# EAGLE board PCB_2D (EAGLE 9.7.0)
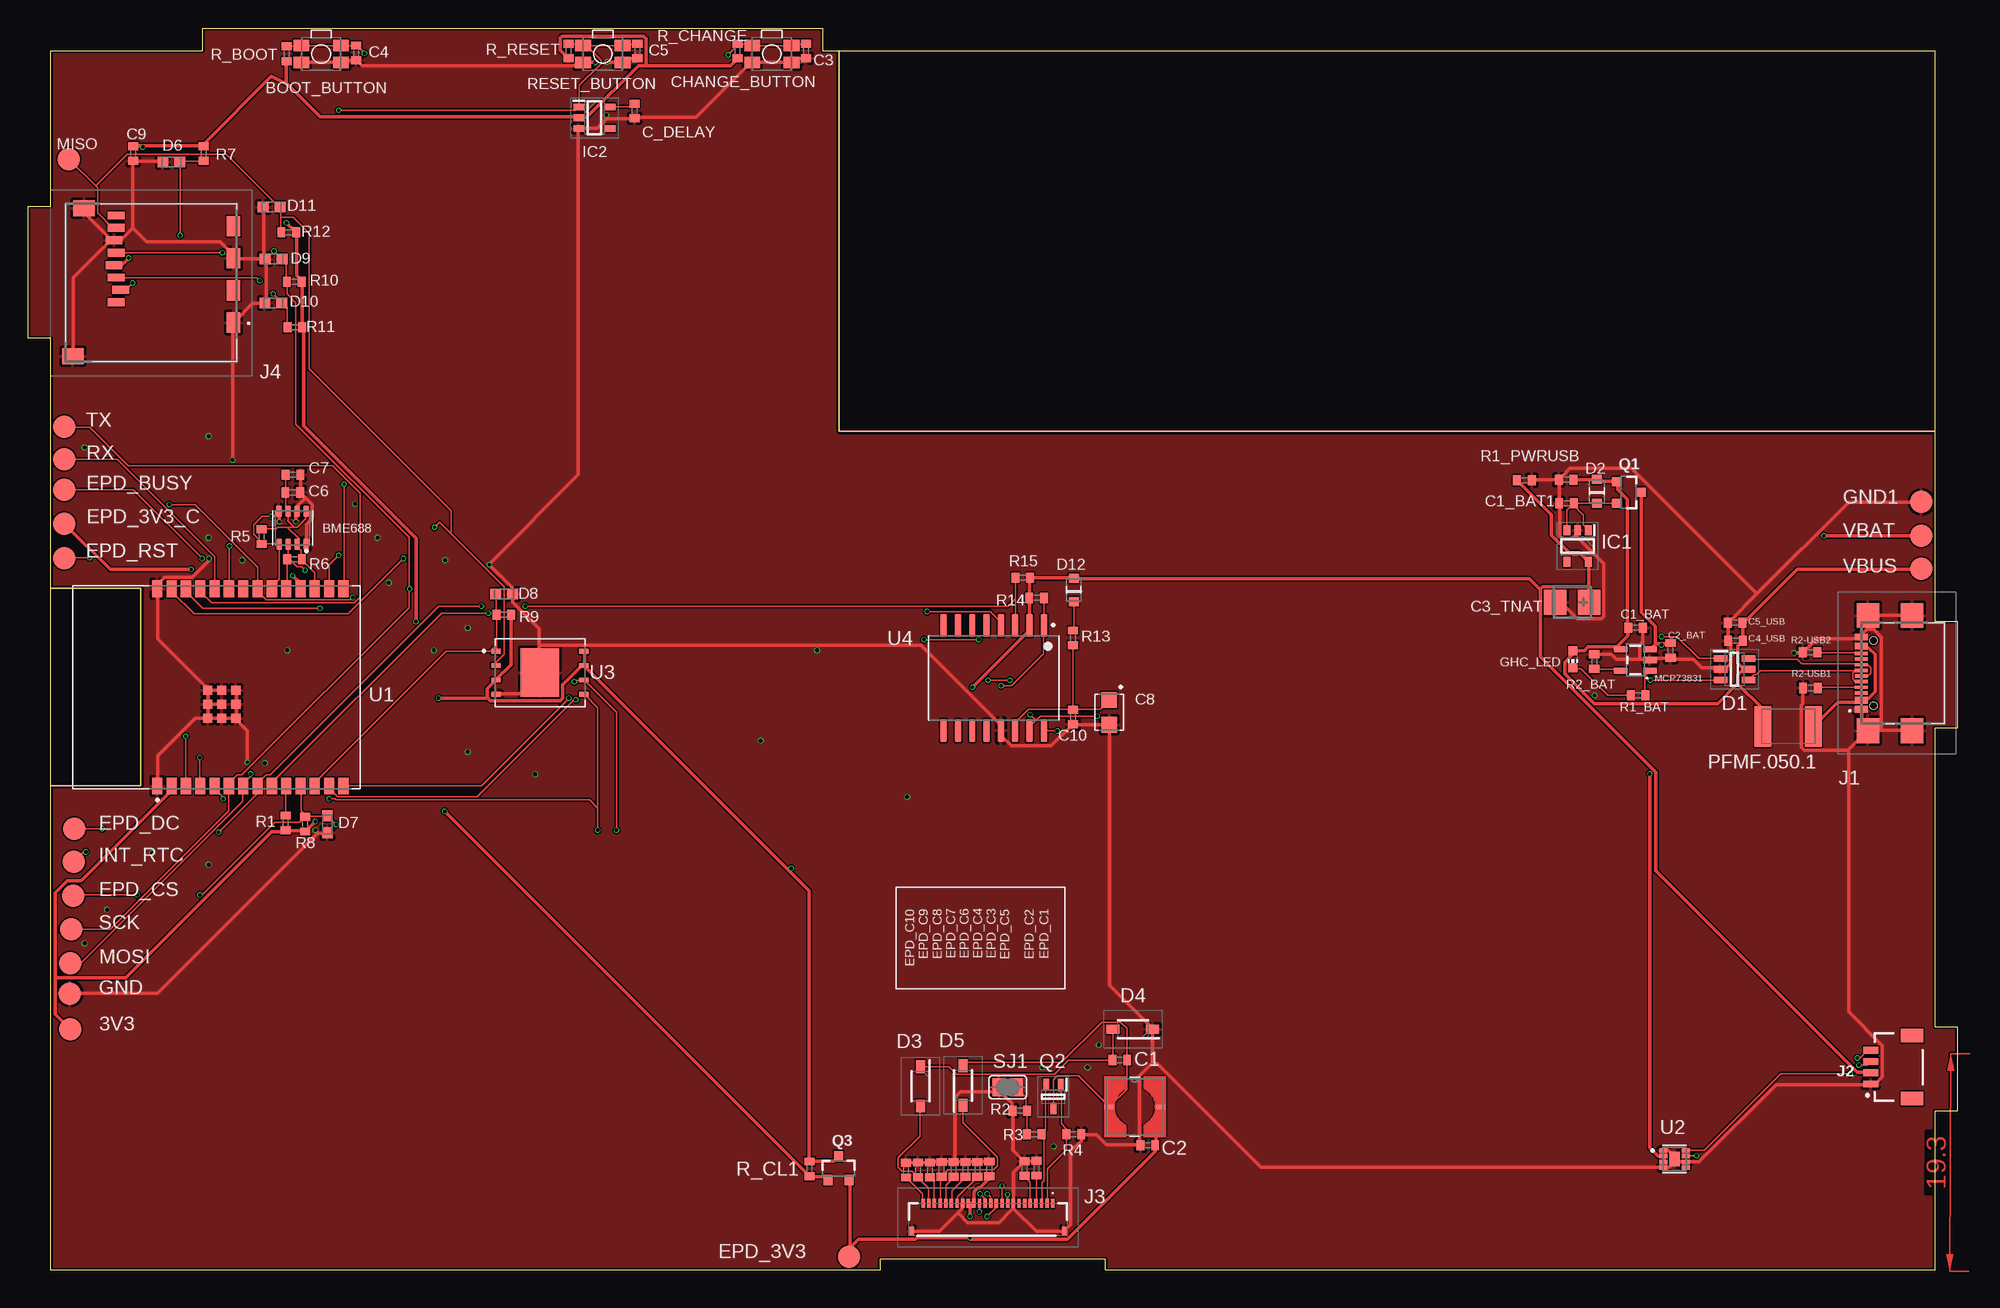
[diagram p0: board, top side]
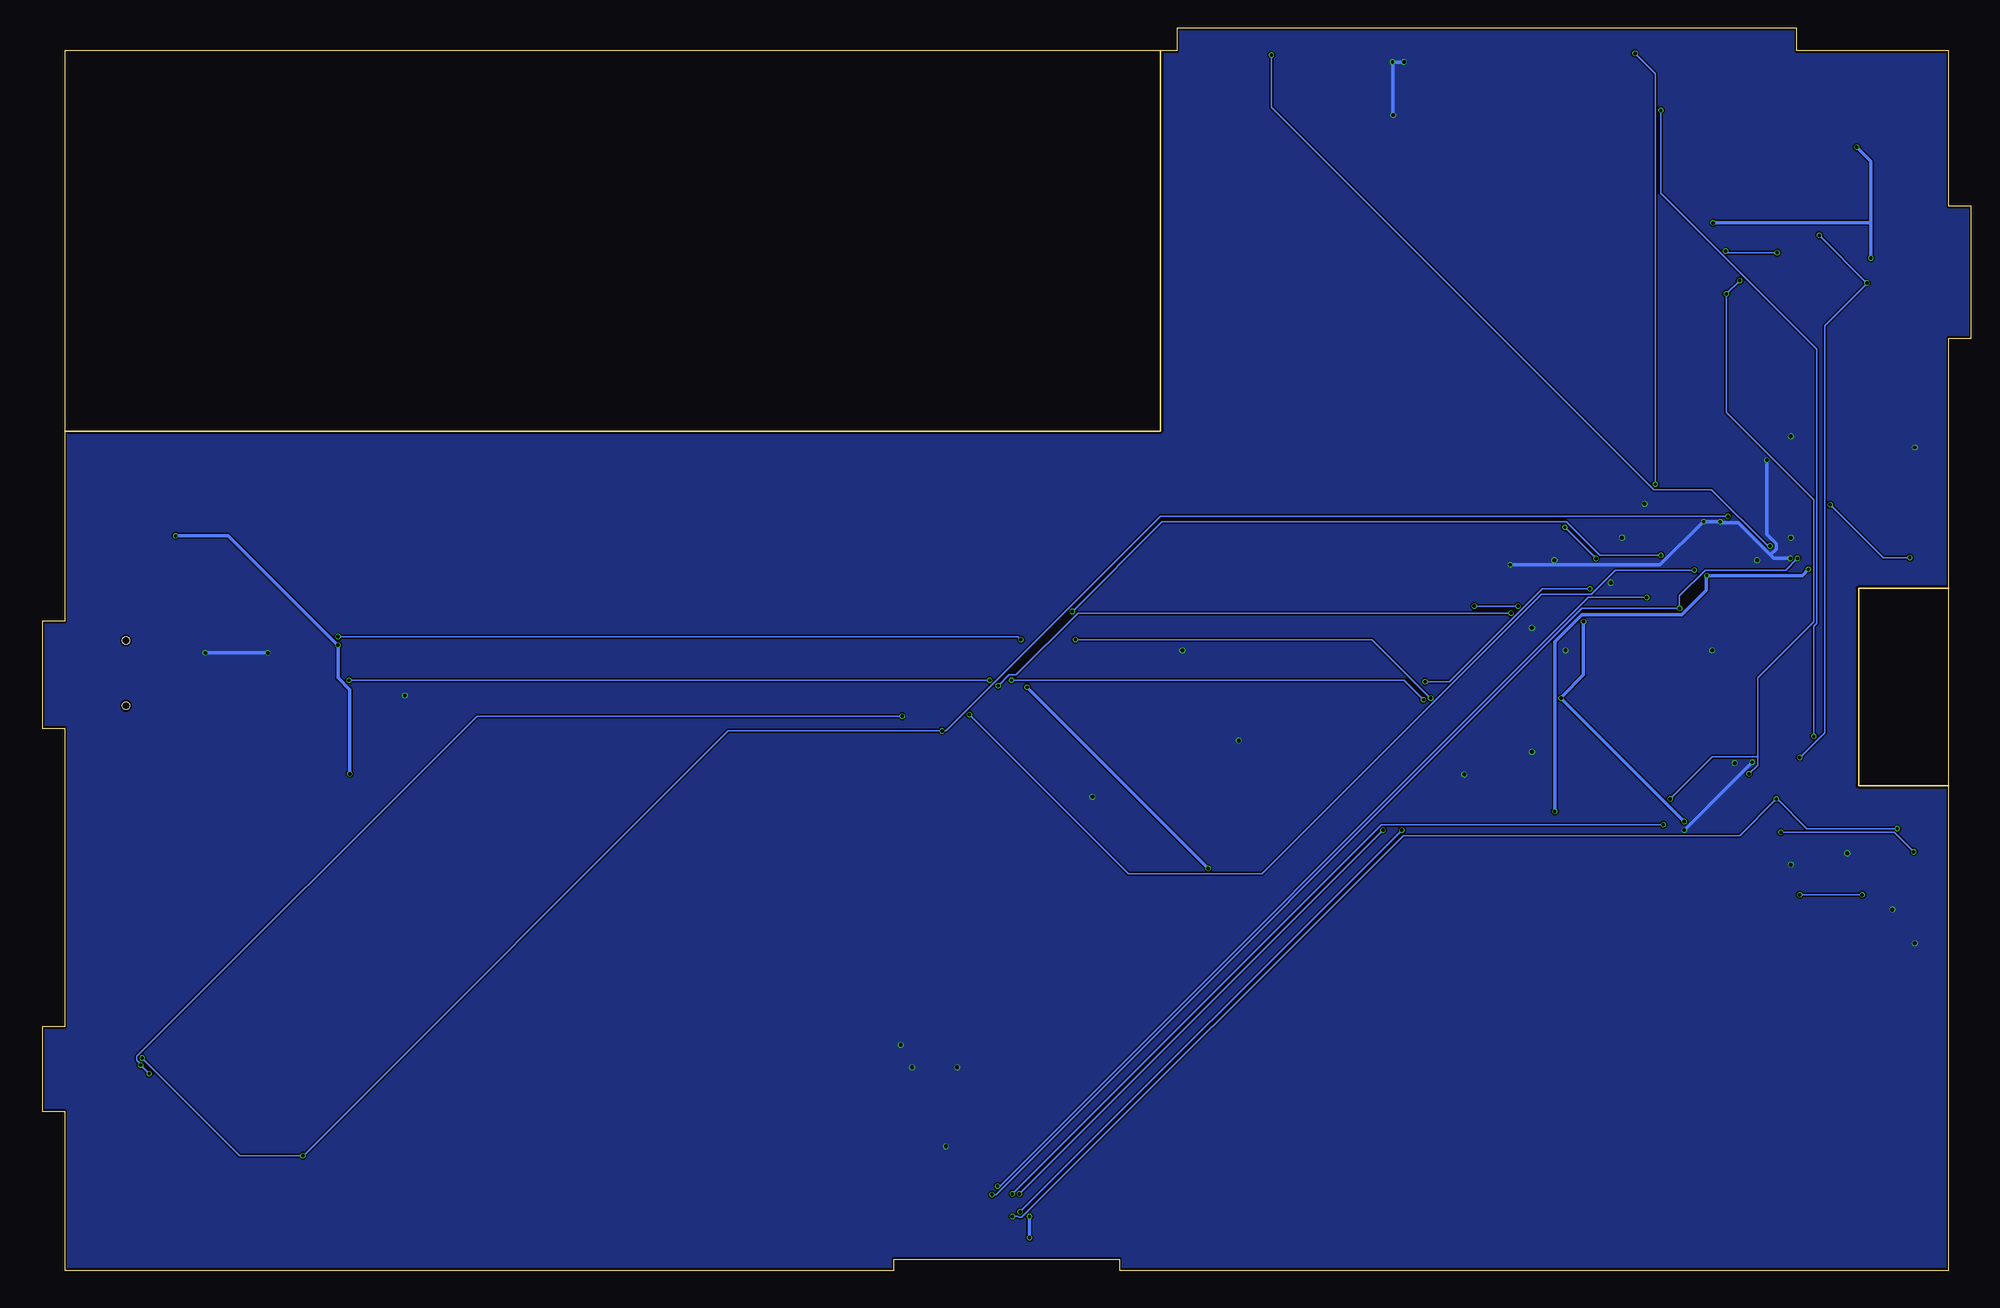
[diagram p1: board, bottom side, seen from below]

Size 171.2 x 110.2 mm. Coordinates in mm from the lower left corner, seen from the top.
Outline: 169.2,74.45 169.2,108.2 71.97,108.2
Outline: 169.2,74.45 169.2,57.6 171.2,57.6 171.2,48.1 169.2,48.1 169.2,21.63 171.2,21.63 171.2,14.1 169.2,14.1 169.2,0 95.6,0 95.6,1 75.6,1 75.6,0 2,0 2,43
Outline: 71.97,108.2 70.5,108.2 70.5,110.2 15.5,110.2 15.5,108.2 2,108.2 2,94.4 0,94.4 0,82.7 2,82.7 2,60.51
Outline: 2,43 2,60.51
Outline: 2,60.51 10,60.51 10,43 2,43
Outline: 71.97,108.2 71.97,74.45 169.2,74.45
Copper layers (1*16): Top 0.035mm / dielectric 1.6mm / Bottom 0.035mm
Design rules "jlcpcb-2layers.dru *": minimum track width 0.15mm, minimum drill 0.3mm, track to track 5mil, track to pad 5mil, pad to pad 5mil, via to via 5mil, smd to smd 5mil, copper to edge 0.2mm, drill to drill 6mil, minimum pad ring 10mil, minimum via ring 3mil, stop-mask expansion 4mil, vias tented up to drill 0mil, thermal gap 10mil
Net classes: 1 Power class: width 0.3 mm

## Footprints (pad centres in the part's own frame; a part is rotated, then mirrored left to right if it is on the bottom)
TP20R = smd 2 x 2: TP 0,0
ESP32_WROVER_BME680_PSON80P300X300X100-8N = smd 1.016 x 0.5: 1 1.458,1.2; 2 1.458,0.4; 3 1.458,-0.4; 4 1.458,-1.2; 5 -1.458,-1.22; 6 -1.458,-0.4; 7 -1.458,0.4; 8 -1.458,1.2
MYBUTTON = smd 1.4 x 1.05: 1 1.75,0.75; 2 -1.75,0.75; 3 -1.75,-0.75; 4 1.75,-0.75
EAGLE-LTSPICE_C0402 = smd 0.7 x 0.9: 1 -0.65,0; 2 0.65,0
RCL_CT3528 = smd 2 x 2.2: + -1.5,0; - 1.5,0
CAPCP3225X100N = smd 1.4 x 1.4: 1 -1.1,0; 2 1.1,0
SOT95P280X145-6N = smd 1.2 x 0.6: 1 -1.25,0.95; 2 -1.25,0; 3 -1.25,-0.95; 4 1.25,-0.95; 5 1.25,0; 6 1.25,0.95
ESP32_WROVER_AVX---SD0805S020S1R0_AVX_SD0805S020S1R0_0 = smd 0.8 x 0.9: 1 -1.05,0; 2 1.05,0
SOD3716X135N = smd 1.15 x 0.8: 1 -1.75,0; 2 1.75,0
DIOC1608X36N = smd 0.97 x 0.94: 1 -0.75,0; 2 0.75,0
ADAFRUIT_CHIP-LED0603 = smd 0.8 x 0.8: A 0,-0.75; C 0,0.75
SOT95P280X120-5N = smd 0.9 x 0.6: 1 -1.4,0.95; 2 -1.4,0; 3 -1.4,-0.95; 4 1.4,-0.95; 5 1.4,0.95
SOT95P280X125-5N = smd 0.9 x 0.6: 1 -1.4,0.95; 2 -1.4,0; 3 -1.4,-0.95; 4 1.4,-0.95; 5 1.4,0.95
SAMACSYS_PARTS_USB4110GFA = smd 0.3 x 1.15: A1 -3.35,3.678; A4 -2.55,3.678; A5 -1.25,3.678; A6 -0.25,3.678; A7 0.25,3.678; A8 1.25,3.678; A9 2.55,3.678; A12 3.35,3.678; B1 3.05,3.678; B4 2.25,3.678; B5 1.75,3.678; B6 0.75,3.678; B7 -0.75,3.678; B8 -1.75,3.678; B9 -2.25,3.678; B12 -3.05,3.678 | smd 2.18 x 2: MP1 -5.11,-0.827; MP2 5.11,-0.827; MP3 -5.11,3.103; MP4 5.11,3.103 | hole 0.65: -2.89,2.603; 2.89,2.603
JST04_1MM_RA = smd 0.6 x 1.35: 1 -1.5,0; 2 -0.5,0; 3 0.5,0; 4 1.5,0 | smd 1.2 x 2: NC1 2.8,-3.675; NC2 -2.8,-3.675
FH34SRJ24S05SH99 = smd 0.3 x 0.8: 1 5.75,1.45; 2 5.25,1.45; 3 4.75,1.45; 4 4.25,1.45; 5 3.75,1.45; 6 3.25,1.45; 7 2.75,1.45; 8 2.25,1.45; 9 1.75,1.45; 10 1.25,1.45; 11 0.75,1.45; 12 0.25,1.45; 13 -0.25,1.45; 14 -0.75,1.45; 15 -1.25,1.45; 16 -1.75,1.45; 17 -2.25,1.45; 18 -2.75,1.45; 19 -3.25,1.45; 20 -3.75,1.45; 21 -4.25,1.45; 22 -4.75,1.45; 23 -5.25,1.45; 24 -5.75,1.45 | smd 0.4 x 0.8: MP1 6.75,-1.05; MP2 -6.75,-1.05
112ATAARR03ATTEND = smd 1.8 x 1.2: G1 10.6,10.4; G2 4.9,10.4; S1 7.75,10.4; S2 2.05,10.4 | smd 1.4 x 1.9: G3 13.6,-3.85; G4 0.45,-2.85 | smd 0.7 x 1.5: P1 8.8,0; P2 7.7,0.4; P3 6.6,0; P4 5.5,-0.2; P5 4.4,0; P6 3.3,-0.2; P7 2.2,0; P8 1.1,0
IND_4828-WE-TPC_WRE = smd 0.813 x 0.406: 1 -2.286,0; 2 2.286,0
ESP32_WROVER_SPARKFUN-IC-POWER_SOT23-5 = smd 0.55 x 1.2: 1 -0.95,-1.3; 2 0,-1.3; 3 0.95,-1.3; 4 0.95,1.3; 5 -0.95,1.3
ESP32C6_VARISTOR_CT/CN1812 = smd 1.5 x 3.6: 1 -2.25,0; 2 2.25,0
ESP32_WROVER_SPARKFUN-DISCRETESEMI_SOT23-3 = smd 0.8 x 0.9: 1 -0.95,-1; 2 0.95,-1; 3 0,1.1
SOT65P210X110-3N = smd 1.05 x 0.5: 1 -1.05,0.65; 2 -1.05,-0.65; 3 1.05,0
ESP32_WROVER_EAGLE-LTSPICE_R0402 = smd 0.7 x 0.9: 1 -0.65,0; 2 0.65,0
SJ = smd 1.168 x 1.6: 1 -0.762,0; 2 0.762,0
XCVR_ESP32-C6-WROOM-1-N8 = smd 1.5 x 0.9: 1 -8.75,5.26; 2 -8.75,3.99; 3 -8.75,2.72; 4 -8.75,1.45; 5 -8.75,0.18; 6 -8.75,-1.09; 7 -8.75,-2.36; 8 -8.75,-3.63; 9 -8.75,-4.9; 10 -8.75,-6.17; 11 -8.75,-7.44; 12 -8.75,-8.71; 13 -8.75,-9.98; 14 -8.75,-11.25; 15 8.75,-11.25; 16 8.75,-9.98; 17 8.75,-8.71; 18 8.75,-7.44; 19 8.75,-6.17; 20 8.75,-4.9; 21 8.75,-3.63; 22 8.75,-2.36; 23 8.75,-1.09; 24 8.75,0.18; 25 8.75,1.45; 26 8.75,2.72; 27 8.75,3.99; 28 8.75,5.26 | smd 0.8 x 0.8: 29_1 -2.755,0.79; 29_2 -1.505,0.79; 29_3 -0.255,0.79; 29_4 -2.755,-0.46; 29_5 -1.505,-0.46; 29_6 -0.255,-0.46; 29_7 -2.755,-1.71; 29_8 -1.505,-1.71; 29_9 -0.255,-1.71
SON50P200X200X80-9N = smd 0.813 x 0.406: 1 -0.985,0.75; 2 -0.985,0.25; 3 -0.985,-0.25; 4 -0.985,-0.75; 5 0.985,-0.75; 6 0.985,-0.25; 7 0.985,0.25; 8 0.985,0.75 | smd 0.9 x 1.3: 9 0,0
SON127P600X800X80-9N = smd 0.94 x 0.44: 1 -3.895,1.905; 2 -3.895,0.635; 3 -3.895,-0.635; 4 -3.895,-1.905; 5 3.895,-1.905; 6 3.895,-0.635; 7 3.895,0.635; 8 3.895,1.905 | smd 3.4 x 4.3: 9 0,0
SOIC127P1032X265-16N = smd 2.05 x 0.59: 1 -4.655,4.445; 2 -4.655,3.175; 3 -4.655,1.905; 4 -4.655,0.635; 5 -4.655,-0.635; 6 -4.655,-1.905; 7 -4.655,-3.175; 8 -4.655,-4.445; 9 4.655,-4.445; 10 4.655,-3.175; 11 4.655,-1.905; 12 4.655,-0.635; 13 4.655,0.635; 14 4.655,1.905; 15 4.655,3.175; 16 4.655,4.445

## Placement (x,y rotation side)
3V3  TPTP20R  [TP20R]  3.74,21.38 0 top
BME688  ESP32_WROVER_BME680_BME680  [ESP32_WROVER_BME680_PSON80P300X300X100-8N]  23.47,65.88 270 top
BOOT_BUTTON  BUTTON_CUSYOMV1  [MYBUTTON]  26,107.91 180 top
C1  4.7uF/25V  [EAGLE-LTSPICE_C0402]  96.87,18.66 0 top
C1_BAT  4.7uF  [EAGLE-LTSPICE_C0402]  142.63,57.01 0 top
C1_BAT1  4.7uF  [EAGLE-LTSPICE_C0402]  136.5,68.06 180 top
C1_BAT2  4.7uF  [EAGLE-LTSPICE_C0402]  132.77,70.08 0 top
C2  10uF  [EAGLE-LTSPICE_C0402]  99.36,11.09 180 top
C2_BAT  4.7uF  [EAGLE-LTSPICE_C0402]  145.74,55.01 270 top
C3  100nF  [EAGLE-LTSPICE_C0402]  69.03,108.18 270 top
C3_TNAT  100uF  [RCL_CT3528]  137.01,59.26 180 top
C4  100nF  [EAGLE-LTSPICE_C0402]  29.1,108.01 270 top
C4_USB  100nF  [EAGLE-LTSPICE_C0402]  151.49,55.86 180 top
C5  1uF  [EAGLE-LTSPICE_C0402]  54.06,108.17 270 top
C5_USB  4.7uF  [EAGLE-LTSPICE_C0402]  151.47,57.46 180 top
C6  100nF  [EAGLE-LTSPICE_C0402]  23.48,69.01 0 top
C7  100nF  [EAGLE-LTSPICE_C0402]  23.51,70.57 0 top
C8  CPH3225A  [CAPCP3225X100N]  95.93,49.5 270 top
C9  100nF  [EAGLE-LTSPICE_C0402]  9.33,99.09 270 top
C10  100nF  [EAGLE-LTSPICE_C0402]  92.71,49.09 270 top
C_DELAY  100nF  [EAGLE-LTSPICE_C0402]  53.82,102.85 270 top
CHANGE_BUTTON  BUTTON_CUSYOMV1  [MYBUTTON]  66,107.91 180 top
D1  USBLC6-2SC6Y  [SOT95P280X145-6N]  151.41,53.33 0 top
D2  ESP32_WROVER_AVX---SD0805S020S1R0_AVX_SD0805S020S1R0_0_0AVX_SD0805S020S1R0_0_0  [ESP32_WROVER_AVX---SD0805S020S1R0_AVX_SD0805S020S1R0_0]  139.2,69.12 90 top
D3  MBR0530""  [SOD3716X135N]  79.18,16.33 270 top
D4  MBR0530""  [SOD3716X135N]  98.03,21.4 180 top
D5  MBR0530""  [SOD3716X135N]  82.95,16.41 90 top
D6  PGB1010603MR""  [DIOC1608X36N]  12.71,98.33 0 top
D7  PGB1010603MR""  [DIOC1608X36N]  26.54,39.58 90 top
D8  PGB1010603MR""  [DIOC1608X36N]  42.24,60.02 180 top
D9  PGB1010603MR""  [DIOC1608X36N]  21.79,89.71 0 top
D10  PGB1010603MR""  [DIOC1608X36N]  21.76,85.83 0 top
D11  PGB1010603MR""  [DIOC1608X36N]  21.61,94.33 0 top
D12  ESP32_WROVER_AVX---SD0805S020S1R0_AVX_SD0805S020S1R0_0_0AVX_SD0805S020S1R0_0_0  [ESP32_WROVER_AVX---SD0805S020S1R0_AVX_SD0805S020S1R0_0]  92.79,60.37 90 top
EPD_3V3  TPTP20R  [TP20R]  72.86,1.2 0 top
EPD_3V3_C  TPTP20R  [TP20R]  3.22,66.25 0 top
EPD_BUSY  TPTP20R  [TP20R]  3.2,69.25 0 top
EPD_C1  1uF/50V  [EAGLE-LTSPICE_C0402]  89.47,9.06 270 top
EPD_C2  1uF/50V  [EAGLE-LTSPICE_C0402]  88.42,9.03 270 top
EPD_C3  1uF/50V  [EAGLE-LTSPICE_C0402]  84.22,8.97 270 top
EPD_C4  1uF/50V  [EAGLE-LTSPICE_C0402]  83.17,8.96 270 top
EPD_C5  0.1uF/50V  [EAGLE-LTSPICE_C0402]  85.28,9.01 270 top
EPD_C6  1uF/50V  [EAGLE-LTSPICE_C0402]  82.12,8.96 270 top
EPD_C7  1uF/50V  [EAGLE-LTSPICE_C0402]  81.07,8.96 270 top
EPD_C8  1uF/50V  [EAGLE-LTSPICE_C0402]  80.01,8.92 270 top
EPD_C9  1uF/50V  [EAGLE-LTSPICE_C0402]  78.96,8.92 270 top
EPD_C10  1uF/50V  [EAGLE-LTSPICE_C0402]  77.91,8.88 270 top
EPD_CS  TPTP20R  [TP20R]  3.98,33.25 0 top
EPD_DC  TPTP20R  [TP20R]  4.1,39.17 0 top
EPD_RST  TPTP20R  [TP20R]  3.2,63.17 0 top
GHC_LED  [ADAFRUIT_CHIP-LED0603]  137.07,54.21 180 top
GND  TPTP20R  [TP20R]  3.71,24.55 0 top
GND1  TPTP20R  [TP20R]  168,68.17 0 top
IC1  XC6220A331MR-G  [SOT95P280X120-5N]  137.5,64.25 270 top
IC2  BD5229G-TR  [SOT95P280X125-5N]  50.26,102.25 0 top
INT_RTC  TPTP20R  [TP20R]  4.06,36.25 0 top
J1  SAMACSYS_PARTS_USB4110-GF-A  [SAMACSYS_PARTS_USB4110GFA]  166.36,52.98 90 top
J2  QWIIC_RIGHT_ANGLE  [JST04_1MM_RA]  163.51,18.03 90 top
J3  FH34SRJ-24S-0.5SH_99_  [FH34SRJ24S05SH99]  85.17,4.5 0 top
J4  112A-TAAR-R03_ATTENDPACHET  [112ATAARR03ATTEND]  7.82,94.68 270 top
L1  68uH  [IND_4828-WE-TPC_WRE]  98.2,14.51 0 top
MCP73831  ESP32_WROVER_SPARKFUN-IC-POWER_MCP73831  [ESP32_WROVER_SPARKFUN-IC-POWER_SOT23-5]  142.61,54.15 90 top
MISO  TPTP20R  [TP20R]  3.61,98.56 0 top
MOSI  TPTP20R  [TP20R]  3.74,27.25 0 top
PFMF.050.1  ESP32C6_VARISTORCN1812  [ESP32C6_VARISTOR_CT/CN1812]  156.17,48.26 180 top
Q1  20V/4.2A/52mΩ/1.4W  [ESP32_WROVER_SPARKFUN-DISCRETESEMI_SOT23-3]  141.99,69.02 270 top
Q2  SI1308EDL-T1-GE3  [SOT65P210X110-3N]  90.98,15.41 270 top
Q3  20V/4.2A/52mΩ/1.4W  [ESP32_WROVER_SPARKFUN-DISCRETESEMI_SOT23-3]  71.91,9.02 0 top
R1  10K  [ESP32_WROVER_EAGLE-LTSPICE_R0402]  22.87,39.7 270 top
R1_BAT  200  [ESP32_WROVER_EAGLE-LTSPICE_R0402]  142.85,51.01 0 top
R1_PWRUSB  100K  [ESP32_WROVER_EAGLE-LTSPICE_R0402]  136.47,70.13 0 top
R2  2.2  [ESP32_WROVER_EAGLE-LTSPICE_R0402]  87.98,14.17 0 top
R2-USB1  5K1  [ESP32_WROVER_EAGLE-LTSPICE_R0402]  158.15,51.67 0 top
R2-USB2  5K1  [ESP32_WROVER_EAGLE-LTSPICE_R0402]  158.12,54.84 180 top
R2_BAT  2K  [ESP32_WROVER_EAGLE-LTSPICE_R0402]  138.96,54.01 270 top
R3  0.47  [ESP32_WROVER_EAGLE-LTSPICE_R0402]  89.28,12.09 0 top
R4  10K  [ESP32_WROVER_EAGLE-LTSPICE_R0402]  92.8,12.09 180 top
R5  10K  [ESP32_WROVER_EAGLE-LTSPICE_R0402]  20.72,65.09 90 top
R6  10K  [ESP32_WROVER_EAGLE-LTSPICE_R0402]  23.64,63.09 0 top
R7  10K  [ESP32_WROVER_EAGLE-LTSPICE_R0402]  15.56,99.09 90 top
R8  10K  [ESP32_WROVER_EAGLE-LTSPICE_R0402]  24.59,39.59 270 top
R9  10K  [ESP32_WROVER_EAGLE-LTSPICE_R0402]  42.22,58.17 0 top
R10  10K  [ESP32_WROVER_EAGLE-LTSPICE_R0402]  23.61,87.72 0 top
R11  10K  [ESP32_WROVER_EAGLE-LTSPICE_R0402]  23.67,83.67 0 top
R12  10K  [ESP32_WROVER_EAGLE-LTSPICE_R0402]  23.12,92.09 0 top
R13  15  [ESP32_WROVER_EAGLE-LTSPICE_R0402]  92.72,56.11 270 top
R14  10K  [ESP32_WROVER_EAGLE-LTSPICE_R0402]  89.48,59.65 180 top
R15  10K  [ESP32_WROVER_EAGLE-LTSPICE_R0402]  88.26,61.43 0 top
R_BOOT  10K  [ESP32_WROVER_EAGLE-LTSPICE_R0402]  22.95,107.93 270 top
R_CHANGE  10K  [ESP32_WROVER_EAGLE-LTSPICE_R0402]  62.95,108.18 270 top
R_CL1  10K  [ESP32_WROVER_EAGLE-LTSPICE_R0402]  69.34,9.01 90 top
R_RESET  10K  [ESP32_WROVER_EAGLE-LTSPICE_R0402]  47.95,108.18 270 top
RESET_BUTTON  BUTTON_CUSYOMV1  [MYBUTTON]  51,107.91 180 top
RX  TPTP20R  [TP20R]  3.2,71.97 0 top
SCK  TPTP20R  [TP20R]  3.82,30.25 0 top
SJ1  [SJ]  86.93,16.25 0 top
TX  TPTP20R  [TP20R]  3.2,74.85 0 top
U1  ESP32-C6-WROOM-1-N8  [XCVR_ESP32-C6-WROOM-1-N8]  16.73,51.72 90 top
U2  MAX17048G+T10  [SON50P200X200X80-9N]  146.1,9.88 0 top
U3  W25Q512JVEIQ  [SON127P600X800X80-9N]  45.42,53.02 0 top
U4  DS3231SN#  [SOIC127P1032X265-16N]  85.68,52.56 270 top
VBAT  TPTP20R  [TP20R]  168,65.17 0 top
VBUS  TPTP20R  [TP20R]  168,62.25 0 top

## Library data of the parts
3V3 BOOT_BUTTON CHANGE_BUTTON D3-D11 EPD_3V3 EPD_3V3_C EPD_BUSY EPD_CS EPD_DC EPD_RST GHC_LED GND GND1 INT_RTC J4 MISO MOSI PFMF.050.1 R1 R1_BAT R1_PWRUSB R2 R2-USB1 R2-USB2 R2_BAT R3-R15 R_BOOT R_CHANGE R_CL1 R_RESET RESET_BUTTON RX SCK SJ1 TX VBAT VBUS = DeskAssistant v19 v1
BME688 = DeskAssistant v19 v1; AVAILABILITY: Unavailable; DESCRIPTION: Integrated Environmental Unit; MF: Bosch Sensortec; MP: BME680; PACKAGE: LGA-8 Bosch Tools; PRICE: None
C1 C1_BAT C1_BAT1 C1_BAT2 C2 C2_BAT C3 C4 C4_USB C5 C5_USB C6 C7 C9 C10 C_DELAY EPD_C1-EPD_C10 = DeskAssistant v19 v1; SPICEMODEL: NONE; SPICEPREFIX: C
C3_TNAT = DeskAssistant v19 v1; SPICEPREFIX: C
C8 = DeskAssistant v19 v1; AVAILABILITY: Not in stock; CHECK_PRICES: https://www.snapeda.com/parts/CPH3225A/Seiko+Instruments/view-part/?ref=eda; DESCRIPTION: 11 mF (EDLC) Supercapacitor 3.3 V 1210 (3225 Metric) - -; MF: Seiko Instruments; MP: CPH3225A; PACKAGE: 1210 Seiko; PRICE: None; PURCHASE-URL: https://www.snapeda.com/api/url_track_click_mouser/?unipart_id=562593&manufacturer=Seiko Instruments&part_name=CPH3225A&search_term=None; SNAPEDA_LINK: https://www.snapeda.com/parts/CPH3225A/Seiko+Instruments/view-part/?ref=snap
D1 = DeskAssistant v19 v1; AVAILABILITY: In Stock; CHECK_PRICES: https://www.snapeda.com/parts/USBLC6-2SC6Y/STMicroelectronics/view-part/?ref=eda; DESCRIPTION: 17V Clamp 5A (8/20µs) Ipp Tvs Diode Surface Mount SOT-23-6; MF: STMicroelectronics; MP: USBLC6-2SC6Y; PACKAGE: SOT-23-6 STMicroelectronics; PRICE: None; SNAPEDA_LINK: https://www.snapeda.com/parts/USBLC6-2SC6Y/STMicroelectronics/view-part/?ref=snap
D2 D12 = DeskAssistant v19 v1; CENTROID_NOT_SPECIFIED: No; DATASHEET: http://datasheets.avx.com/schottky.pdf; DIGIKEY_DESCRIPTION: DIODE SCHOTTKY 20V 1A 0805; DIGIKEY_PART_NUMBER: 478-7800-1-ND; LEAD_FREE: yes; MF: AVX; MOUSER_PART_NUMBER: 581-SD0805S020S1R0; PACKAGE: 0805 (2012 metric); PREFIX: D; ROHS: yes; TEMPERATURE_RANGE_HIGH: +125°C; TEMPERATURE_RANGE_LOW: -55°C
IC1 = DeskAssistant v19 v1; DESCRIPTION: LDO Voltage Regulators; HEIGHT: 1.2mm; MANUFACTURER_NAME: Torex; MANUFACTURER_PART_NUMBER: XC6220A331MR-G; MOUSER_PART_NUMBER: 865-XC6220A331MR-G; MOUSER_PRICE-STOCK: https://www.mouser.co.uk/ProductDetail/Torex-Semiconductor/XC6220A331MR-G?qs=AsjdqWjXhJ8ZSWznL1J0gg%3D%3D
IC2 = DeskAssistant v19 v1; DESCRIPTION: Voltage Detector with Adjustable Delay Time: CMOS processes are utilized to develop high precision, low current consumption CMOS reset ICs that allow arbitrary setting of the delay time. The extensive lineup includes both Nch Open Drain and CMOS output types in a wide range of detection voltages (from 2.3V to 6.0V, in 0.1V steps), enabling selection of the ideal solution based on customer requirements. In addition, the entire series is of course both lead-free and RoHS-compliant.; HEIGHT: 1.25mm; MANUFACTURER_NAME: ROHM Semiconductor; MANUFACTURER_PART_NUMBER: BD5229G-TR; MOUSER_PART_NUMBER: 755-BD5229G-TR; MOUSER_PRICE-STOCK: https://www.mouser.co.uk/ProductDetail/ROHM-Semiconductor/BD5229G-TR?qs=4kLU8WoGk0vvnhrrYwdszw%3D%3D
J1 = DeskAssistant v19 v1; DESCRIPTION: CONN USB 2.0 TYPE-C R/A SMT; HEIGHT: 3.26mm; MANUFACTURER_NAME: GCT (GLOBAL CONNECTOR TECHNOLOGY); MANUFACTURER_PART_NUMBER: USB4110-GF-A; MOUSER_PART_NUMBER: 640-USB4110-GF-A; MOUSER_PRICE-STOCK: https://www.mouser.co.uk/ProductDetail/GCT/USB4110-GF-A?qs=KUoIvG%2F9IlYiZvIXQjyJeA%3D%3D
J2 = DeskAssistant v19 v1; PROD_ID: CONN-13694
J3 = DeskAssistant v19 v1; DESCRIPTION: 24 Position FFC, FPC Connector Contacts, Top and Bottom 0.020" (0.50mm) Surface Mount, Right Angle; HEIGHT: 1.1mm; MANUFACTURER_NAME: Hirose; MANUFACTURER_PART_NUMBER: FH34SRJ-24S-0.5SH(99); MOUSER_PART_NUMBER: 798-FH34SRJ24S05SH99; MOUSER_PRICE-STOCK: https://www.mouser.co.uk/ProductDetail/Hirose-Connector/FH34SRJ-24S-0.5SH99?qs=vcbW%252B4%252BSTIpKBl5ap9J8Fw%3D%3D
L1 = DeskAssistant v19 v1; COPYRIGHT: Copyright (C) 2024 Ultra Librarian. All rights reserved.; MANUFACTURER_PART_NUMBER: 744043680; MFR_NAME: Wurth Electronics
MCP73831 = DeskAssistant v19 v1; PROD_ID: IC-09995
Q1 Q3 = DeskAssistant v19 v1; PROD_ID: TRAN-14388
Q2 = DeskAssistant v19 v1; AVAILABILITY: In Stock; CHECK_PRICES: https://www.snapeda.com/parts/SI1308EDL-T1-GE3/Vishay+Siliconix/view-part/?ref=eda; DESCRIPTION: Si1308EDL-T1-GE3 N-channel MOSFET Transistor, 1.5 A, 30 V, 3-Pin SC-70 | Siliconix / Vishay SI1308EDL-T1-GE3; MF: Vishay Siliconix; MP: SI1308EDL-T1-GE3; PACKAGE: SOT-323 Vishay Semiconductor; PRICE: None; PURCHASE-URL: https://www.snapeda.com/api/url_track_click_mouser/?unipart_id=274603&manufacturer=Vishay Siliconix&part_name=SI1308EDL-T1-GE3&search_term=None; SNAPEDA_LINK: https://www.snapeda.com/parts/SI1308EDL-T1-GE3/Vishay+Siliconix/view-part/?ref=snap
U1 = DeskAssistant v19 v1; AVAILABILITY: In Stock; CHECK_PRICES: https://www.snapeda.com/parts/ESP32-C6-WROOM-1-N8/Espressif+Systems/view-part/?ref=eda; DESCRIPTION: Multiprotocol Modules ESP32-C6 module, Wi-Fi 6 in 2.4 GHz band, Bluetooth 5, Zigbee 3.0 and Thread. ESP34-WROOM Compatible - ENGINEERING SAMPLE; MF: Espressif Systems; MP: ESP32-C6-WROOM-1-N8; PACKAGE: None; PRICE: None; SNAPEDA_LINK: https://www.snapeda.com/parts/ESP32-C6-WROOM-1-N8/Espressif+Systems/view-part/?ref=snap
U2 = DeskAssistant v19 v1; AVAILABILITY: In Stock; CHECK_PRICES: https://www.snapeda.com/parts/MAX17048G+T10/Analog+Devices/view-part/?ref=eda; DESCRIPTION: 3µA 1-Cell/2-Cell Fuel Gauge with ModelGauge; MF: Analog Devices; MP: MAX17048G+T10; PACKAGE: TDFN-8 Maxim; PRICE: None; PURCHASE-URL: https://www.snapeda.com/api/url_track_click_mouser/?unipart_id=329239&manufacturer=Analog Devices&part_name=MAX17048G+T10&search_term=None; SNAPEDA_LINK: https://www.snapeda.com/parts/MAX17048G+T10/Analog+Devices/view-part/?ref=snap
U3 = DeskAssistant v19 v1; AVAILABILITY: In Stock; CHECK_PRICES: https://www.snapeda.com/parts/W25Q512JVEIQ/Winbond+Electronics/view-part/?ref=eda; DESCRIPTION: FLASH - NOR Memory IC 512Mb (64M x 8) SPI - Quad I/O 133 MHz 8-WSON (8x6); MF: Winbond Electronics; MP: W25Q512JVEIQ; PACKAGE: Package; PRICE: None; SNAPEDA_LINK: https://www.snapeda.com/parts/W25Q512JVEIQ/Winbond+Electronics/view-part/?ref=snap
U4 = DeskAssistant v19 v1; AVAILABILITY: In Stock; CHECK_PRICES: https://www.snapeda.com/parts/DS3231SN%23/Analog+Devices/view-part/?ref=eda; DESCRIPTION: Extremely Accurate I²C-Integrated RTC/TCXO/Crystal; MF: Analog Devices; MP: DS3231SN#; PACKAGE: SOIC-16 Maxim; PRICE: None; PURCHASE-URL: https://www.snapeda.com/api/url_track_click_mouser/?unipart_id=99048&manufacturer=Analog Devices&part_name=DS3231SN#&search_term=None; SNAPEDA_LINK: https://www.snapeda.com/parts/DS3231SN%23/Analog+Devices/view-part/?ref=snap

## Nets
3V3 [Power class]: 3V3.TP C1_BAT2.1 C3_TNAT.+ C9.1 D12.2 IC1.5 IC2.2 J2.2 J4.P4 Q3.3 R1.2 R7.2 R8.2 R9.2 R10.2 R11.2 R12.2 R14.2 R15.2 R_BOOT.2 R_CHANGE.2 R_CL1.2 R_RESET.2 U1.2 U3.3 U3.7 U3.8 U4.2
32KHZ: R14.1 U1.9 U4.1
DN: D1.4 J1.A7 J1.B7
DP: D1.6 J1.A6 J1.B6
EPD_3V3 [Power class]: C2.1 EPD_3V3.TP EPD_C5.2 J3.15 J3.16 L1.2 Q3.2
EPD_3V3_C [Power class]: EPD_3V3_C.TP Q3.1 R_CL1.1 U1.18
EPD_BUSY: EPD_BUSY.TP J3.9 U1.26
EPD_CS: D7.2 EPD_CS.TP J3.12 R8.1 U1.11
EPD_DC: EPD_DC.TP J3.11 U1.5
EPD_RST: EPD_RST.TP J3.10 U1.21
FLASH_CS: D8.2 R9.1 U1.12 U3.1
GDR: J3.2 Q2.1 R4.2
GND [Power class]: BME688.1 BME688.5 BME688.7 BOOT_BUTTON.1 BOOT_BUTTON.2 C1_BAT1.2 C1_BAT2.2 C1_BAT.2 C2.2 C2_BAT.2 C3.2 C3_TNAT.- C4.2 C4_USB.2 C5.2 C5_USB.2 C6.2 C7.2 C8.2 C9.2 C10.2 C_DELAY.2 CHANGE_BUTTON.1 CHANGE_BUTTON.2 D1.2 D4.1 D6.1 D7.1 D8.1 D9.1 D10.1 D11.1 EPD_C1.1 EPD_C2.1 EPD_C3.1 EPD_C4.1 EPD_C5.1 EPD_C6.1 EPD_C7.1 EPD_C8.1 EPD_C9.1 EPD_C10.1 GND1.TP GND.TP IC1.2 IC2.3 J1.A1 J1.A12 J1.B1 J1.B12 J1.MP1 J1.MP2 J1.MP3 J1.MP4 J2.1 J3.8 J3.17 J3.MP1 J3.MP2 J4.G1 J4.G2 J4.G3 J4.G4 J4.P6 MCP73831.2 R1_PWRUSB.1 R2-USB1.1 R2-USB2.2 R2.1 R2_BAT.1 R4.1 RESET_BUTTON.1 RESET_BUTTON.2 SJ1.1 U1.1 U1.28 U1.29_1 U1.29_2 U1.29_3 U1.29_4 U1.29_5 U1.29_6 U1.29_7 U1.29_8 U1.29_9 U2.1 U2.4 U2.6 U2.9 U3.4 U3.9 U4.13
GPIO8: R1.1 U1.10
I2C_PW: BME688.2 BME688.6 BME688.8 C6.1 C7.1 R5.2 R6.2 U1.17
INT_RTC: INT_RTC.TP R15.1 U1.8 U4.3
IO/BOOT: BOOT_BUTTON.3 BOOT_BUTTON.4 C4.1 R_BOOT.1 U1.15
IO/CHANGE: C3.1 CHANGE_BUTTON.3 CHANGE_BUTTON.4 R_CHANGE.1 U1.23
MISO: D11.2 J4.P7 MISO.TP R12.1 U1.27 U3.2
MOSI: D10.2 J3.14 J4.P3 MOSI.TP R11.1 U1.7 U3.5
N$1: J1.A5 R2-USB1.2
N$2: J1.B5 R2-USB2.1
N$3: C1_BAT1.1 D2.1 IC1.1 IC1.3 Q1.2
N$4: MCP73831.1 R1_BAT.2
N$5: MCP73831.5 R2_BAT.2
N$6: GHC_LED.C R1_BAT.1
N$7: C_DELAY.1 IC2.5
N$8: EPD_C3.2 J3.18
N$9: C1.1 D3.1 D4.2
N$10: EPD_C6.2 J3.20
N$11: EPD_C1.2 J3.4
N$12: D12.1 R13.1
N$13: EPD_C2.2 J3.5
N$14: EPD_C8.2 J3.22
N$15: EPD_C10.2 J3.24
N$18: EPD_C4.2 J3.19
PREVGH: D5.1 EPD_C7.2 J3.21
PREVGL: D3.2 EPD_C9.2 J3.23
RESE: J3.3 Q2.2 R3.2
RESE': R2.2 R3.1 SJ1.2
RESET: C5.1 IC2.1 R_RESET.1 RESET_BUTTON.3 RESET_BUTTON.4 U1.3
RTC_RST: U1.16 U4.4
RX: RX.TP U1.24
SCK: D9.2 J3.13 J4.P5 R10.1 SCK.TP U1.6 U3.6
SCL: BME688.4 J2.4 R5.1 U1.20 U2.7 U4.16
SDA: BME688.3 J2.3 R6.1 U1.19 U2.8 U4.15
SRC: C1.2 D5.2 L1.1 Q2.3
SS_SD: D6.2 J4.P2 R7.1 U1.4
TX: TX.TP U1.25
USB_D+: D1.1 U1.14
USB_D-: D1.3 U1.13
VBAT [Power class]: C2_BAT.1 MCP73831.3 Q1.3 U2.2 U2.3 VBAT.TP
VBUS [Power class]: C1_BAT.1 C4_USB.1 C5_USB.1 D1.5 D2.2 GHC_LED.A MCP73831.4 PFMF.050.1.2 Q1.1 R1_PWRUSB.2 VBUS.TP
VRTC: C8.1 C10.1 R13.2 U4.14
VUSB [Power class]: J1.A4 J1.A9 J1.B4 J1.B9 PFMF.050.1.1

## Tracks (layer width: path | path; a pad name or v marks a point on that pad's centre or on a via)
3V3  (via drill 0.3)
  Top 0.3: 138.49,60.66 138.49,59.28 C3_TNAT.+ | 138.49,60.66 138.49,62.81 IC1.5 138.35,62.95 137.66,63.64 136.76,63.64 135.17,65.23 135.17,67.02 C1_BAT2.1 | 134.2,60.45 134.41,60.66 138.49,60.66 | J2.2 163.49,17.59 162.31,17.59 144.45,35.46 144.45,44.2 134.2,54.45 134.2,60.45 | 134.2,60.45 134.06,60.52 133.23,61.35 92.92,61.35 D12.2 89.05,61.42 R15.2 88.84,61.42 88.84,59.69 R14.2 88.84,59.55 88.84,57.27 U4.2 88.84,57.06 88.84,56.78 v83.78,51.73 | 54.84,106.85 62.32,106.85 62.94,107.48 R_CHANGE.2 | 54.84,106.85 54.15,106.85 49.58,102.28 48.88,102.28 IC2.2 48.74,102.35 25.89,102.35 23.05,105.19 22.91,105.26 | 54.84,106.85 54.84,109.28 54.63,109.48 47.36,109.48 47.22,109.35 47.22,108.24 47.91,107.55 R_RESET.2 | 10.17,99.78 15.5,99.78 R7.2 15.57,99.92 21.58,105.93 22.91,105.26 | 10.17,99.78 9.34,99.78 C9.1 | 22.91,105.26 22.91,107.27 R_BOOT.2 | v8.93,89.81 8.3,89.19 7.68,89.19 J4.P4 | v10.17,99.64 10.17,99.78 | v22.91,92.92 23.68,92.16 R12.2 23.81,92.03 23.81,88.28 24.23,87.87 R10.2 24.3,87.66 24.3,83.72 R11.2 24.44,83.58 24.44,74.93 34.41,64.96 v34.41,57.55 | 2.42,25.97 2.42,22.71 3.73,21.4 3V3.TP | 2.42,25.97 2.42,33.52 3.45,34.56 4.7,34.56 12.73,42.59 12.73,42.94 U1.2 | 2.42,25.97 8.65,25.97 21.6,38.92 22.77,38.92 R1.2 22.91,38.99 24.58,38.99 R8.2 v25.48,39.82 | Q3.3 71.87,10.11 71.46,9.7 69.38,9.7 R_CL1.2 69.31,9.83 69.31,33.66 67.51,35.46 | U3.7 49.37,53.67 49.37,54.91 U3.8 | R9.2 42.86,58.17 42.86,53.74 41.54,52.42 U3.3 41.4,52.28 40.71,51.59 40.71,50.83 | 40.71,50.83 40.99,50.55 47.22,50.55 47.43,50.76 47.43,51.94 49.16,53.67 U3.7 | 67.51,35.46 49.44,53.53 U3.7
  Top 0.3: v36.42,50.76 40.57,50.76 40.71,50.83 | 67.51,35.46 v67.72,35.66
  Bottom 0.3: 8.93,92.92 8.93,98.4 v10.17,99.64 | 8.93,92.92 v8.93,89.81 | 8.93,92.92 v22.91,92.92 | v25.48,39.82 v36.42,50.76 36.35,50.9 34.41,52.84 v34.41,57.55 | v67.72,35.66 v83.78,51.73
32KHZ  (via drill 0.3)
  Top 0.15: R14.1 90.16,59.62 90.16,57.27 U4.1 90.09,57.2 90.09,54.71 87.25,51.87 v86.35,51.87 | v40.85,58.31 36.69,58.31 21.67,43.28 21.67,43 U1.9
  Bottom 0.15: v40.85,58.31 79.28,58.31 84.75,52.84 85.38,52.84 v86.35,51.87
DN
  Top 0.15: 162.11,53.18 161.9,52.98 161.9,52.49 162.11,52.28 162.66,52.28 J1.B7 | 162.11,53.18 162.66,53.18 J1.A7 | D1.4 153.11,52.83 153.34,52.83 153.7,53.18 162.11,53.18
DP
  Top 0.15: J1.A6 162.73,52.77 163.28,52.77 163.49,52.98 163.49,53.46 163.28,53.67 162.73,53.67 J1.B6 162.66,53.81 157.4,53.81 156.98,54.22 152.69,54.22 D1.6
EPD_3V3  (via drill 0.3)
  Top 0.3: 83.58,5.96 83.85,5.96 J3.15 83.92,6.09 83.92,6.99 84.27,7.34 84.48,7.34 85.24,8.1 85.24,8.31 EPD_C5.2 | 83.58,5.96 83.44,5.96 J3.16 | L1.2 100.47,14.47 100.06,14.06 100.06,11.15 C2.1 99.99,10.94 99.99,10.53 92.23,2.77 83.58,2.77 v83.58,2.91 78.87,2.91 78.73,2.77 73.69,2.77 72.91,2 | 72.91,2 72.91,1.25 EPD_3V3.TP | 72.91,2 72.91,7.96 Q3.2 | v83.58,4.78 83.58,5.96
  Bottom 0.3: v83.58,2.91 v83.58,4.78
EPD_3V3_C  (via drill 0.3)
  Top 0.3: Q3.1 70.9,8.03 70.63,8.31 69.38,8.31 R_CL1.1 69.24,8.45 v36.97,40.72 | v23.47,61.63 24.16,60.94 24.16,60.52 U1.18 | v14.46,62.19 7.26,62.19 3.25,66.2 EPD_3V3_C.TP
  Bottom 0.3: v14.46,62.19 15.02,61.63 v23.47,61.63 23.54,61.49 23.54,60.32 25.68,58.17 34.55,58.17 36.97,55.75 v36.97,40.72
EPD_BUSY  (via drill 0.3)
  Top 0.15: v86.9,6.72 86.9,5.96 J3.9 | v25.89,58.72 15.5,58.72 14.05,60.18 14.05,60.45 U1.26 | EPD_BUSY.TP 9.34,69.25 v15.43,63.16
  Bottom 0.15: v86.9,6.72 86.55,6.72 34.55,58.72 v25.89,58.72 25.89,59.83 23.61,62.12 16.47,62.12 v15.43,63.16
EPD_CS  (via drill 0.3)
  Top 0.15: v85.1,6.79 85.38,6.51 85.38,5.96 J3.12 | v27.35,39.54 26.58,40.3 D7.2 26.52,40.3 24.64,40.3 R8.1 24.64,40.37 24.23,40.79 24.23,42.94 U1.11 | v9.69,33.31 4.01,33.31 EPD_CS.TP | v15.23,33.31 15.43,33.31 21.88,39.75 22,39.75
  Top 0.152: 22,39.75 24.11,39.75 R8.1
  Bottom 0.15: v85.1,6.79 52.34,39.54 v27.35,39.54 | v15.23,33.31 v9.69,33.31
EPD_DC  (via drill 0.3)
  Top 0.15: v85.1,4.78 85.86,5.54 85.86,5.89 J3.11 | v17.3,41.83 17.3,41.97 16.61,42.66 16.61,42.94 U1.5 | v6.57,39.2 4.15,39.2 EPD_DC.TP
  Bottom 0.15: v85.1,4.78 84.61,4.78 84.55,4.71 84.27,4.71 50.41,38.57 20.56,38.57 v17.3,41.83 17.23,41.83 14.6,39.2 v6.57,39.2
EPD_RST  (via drill 0.3)
  Top 0.15: v86.42,7.48 J3.10 | v28.8,59.69 28.59,59.49 21.11,59.49 20.42,60.18 20.42,60.45 U1.21 20.35,60.52 20.35,62.39 14.81,67.93 v12.53,67.93 | v5.46,63.23 3.25,63.23 EPD_RST.TP
  Bottom 0.15: v86.42,7.48 86.21,7.48 33.99,59.69 v28.8,59.69 | v5.46,63.23 7.82,63.23 v12.53,67.93
FLASH_CS
  Top 0.15: R9.1 41.54,58.17 41.54,59.97 D8.2 | 41,54.91 37.11,54.91 25.48,43.28 25.48,43 U1.12
  Top 0.152: R9.1 41.57,55.48 | 41.57,55.48 41,54.91 | 41.57,55.48 41.57,54.97 U3.1
GDR
  Top 0.15: 90.43,9 90.43,5.96 J3.2 | 91.68,13 91.68,16.41 Q2.1
  Top 0.152: 91.68,13 92.15,12.53 R4.2 92.15,10.72 90.43,9
GND  (via drill 0.3, 0.35)
  Top 0.3: R1_PWRUSB.1 135.86,70.08 135.86,68.07 C1_BAT1.2 135.93,67.93 135.93,65.09 136.14,64.89 136.97,64.89 137.28,65.2 | 137.28,65.2 137.45,65.37 137.45,65.65 IC1.2 | R1_PWRUSB.1 133.84,70.13 133.79,70.08 C1_BAT2.2 | 137.28,65.2 139.81,62.67 139.81,58.03 139.6,57.82 137.45,57.82 136.07,59.21 135.51,59.21 C3_TNAT.- | 142.99,54.22 143.82,54.22 MCP73831.2 143.96,54.15 144.1,54.29 145.69,54.29 C2_BAT.2 145.83,54.22 147.77,54.22 148.53,53.46 150.06,53.46 D1.2 150.19,53.39 150.61,53.39 151.09,53.88 151.09,54.78 | 142.99,54.22 140.92,54.22 140.5,54.64 138.98,54.64 R2_BAT.1 | 142.99,54.22 142.99,55.47 143.27,55.75 143.27,56.99 C1_BAT.2 | 151.09,54.78 151.09,55.61 150.96,55.75 C4_USB.2 150.89,55.88 150.89,57.41 C5_USB.2 150.96,57.55 153.41,60.01 | 153.41,60.01 161.55,68.14 167.99,68.14 GND1.TP | 153.41,60.01 142.26,71.16 136.8,71.16 136.49,70.85 136.49,70.8 R1_PWRUSB.1 | 163.21,56.92 163.21,58.03 J1.MP4 163.35,58.1 167.16,58.1 J1.MP2 | 163.21,56.92 162.73,56.44 J1.A12 162.66,56.3 162.66,56.16 J1.B1 162.66,56.02 158.71,56.02 157.54,54.85 R2-USB2.2 157.33,54.78 v156.7,54.78 | J1.B12 162.66,49.93 162.66,49.65 J1.A1 162.73,49.51 162.73,48.41 163.15,47.99 J1.MP3 | 161.48,46.12 157.6,46.12 157.33,46.4 157.33,50.14 157.47,50.28 157.47,51.66 R2-USB1.1 | 161.48,46.12 163.21,47.85 J1.MP3 | 164.46,47.92 163.35,47.92 J1.MP3 | 164.46,47.92 167.16,47.92 J1.MP1 | 164.46,47.92 164.46,56.16 163.77,56.85 163.35,56.85 163.21,56.92 | U2.9 146.04,9.83 146.04,9.56 145.62,9.14 145.14,9.14 U2.4 145,9.14 109.41,9.14 100.2,18.35 99.92,18.35 99.78,18.42 | U2.9 146.18,9.63 U2.6 147.22,9.63 148.26,9.63 155.11,16.48 163.49,16.48 J2.1 163.63,16.62 163.98,16.62 164.53,17.17 164.53,19.94 161.55,22.92 161.55,45.98 161.48,46.12
  Top 0.3: U2.1 145.14,10.66 145.56,10.66 145.97,10.25 145.97,9.97 U2.9 | v151.16,54.78 151.09,54.78 | EPD_C10.1 77.97,9.56 78.94,9.56 EPD_C9.1 79.08,9.56 79.97,9.56 EPD_C8.1 80.11,9.63 81.01,9.63 EPD_C7.1 81.15,9.63 82.05,9.63 EPD_C6.1 | EPD_C6.1 82.26,9.63 EPD_C4.1 83.3,9.63 84.2,9.63 EPD_C3.1 84.34,9.7 85.24,9.7 EPD_C5.1 | 82.5,5.09 82.88,5.47 82.88,5.89 J3.17 | 82.5,5.09 80.88,3.46 78.45,3.46 J3.MP2 | EPD_C2.1 88.36,9.63 87.45,8.73 87.45,5.96 J3.8 87.45,5.82 87.45,5.47 | 87.45,5.47 89.46,3.46 91.89,3.46 J3.MP1 92.5,4.03 92.5,10.57 93.45,11.52 R4.1 93.48,12.05 94.8,12.05 95.69,11.15 98.67,11.15 C2.2 98.6,11.29 98.6,17.24 99.78,18.42 | EPD_C1.1 89.46,9.7 88.56,9.7 EPD_C2.1 | EPD_C2.1 88.28,9.76 87.39,10.66 87.39,14.06 R2.1 87.32,14.2 87.32,14.82 86.21,15.93 86.21,16.2 SJ1.1 86.07,15.86 82.75,15.86 82.26,15.37 82.26,9.76 EPD_C6.1 | 82.5,5.09 83.37,4.22 86.14,4.22 87.32,5.4 87.45,5.47 | 99.78,18.42 99.78,21.33 D4.1 99.71,21.54 95.97,25.28 95.97,48.27 C8.2 95.9,48.41 92.72,48.41 C10.2 92.58,48.34 90.78,46.54 87.25,46.54 86.35,47.44 86.35,47.85 U4.13 86.21,47.99 86.21,48.48 79.21,55.47 45.35,55.47 | 51.31,102.14 50.48,101.31 48.88,101.31 IC2.3 48.81,101.17 48.81,70.57 40.99,62.74 v40.92,62.6 42.93,60.59 42.93,60.11 D8.1 43,59.97 43,59.28 45.35,56.92 45.35,55.47 | 51.31,102.14 53.8,102.14 C_DELAY.2 53.94,102.28 59.27,102.28 64.12,107.13 CHANGE_BUTTON.1 64.26,107.2 67.65,107.2 CHANGE_BUTTON.2 67.79,107.2 68.06,107.48 69.03,107.48 C3.2 | C5.2 54.01,107.48 53.04,107.48 52.76,107.2 RESET_BUTTON.2 52.62,107.2 v51.38,107.2 | BOOT_BUTTON.1 24.3,107.2 27.62,107.2 BOOT_BUTTON.2 27.76,107.2 27.9,107.34 29.08,107.34 C4.2 29.21,107.27 29.63,106.85 48.47,106.85 48.74,107.13 49.23,107.13 RESET_BUTTON.1 49.37,107.2 v50.34,107.2
  Top 0.3: v51.31,102.49 51.31,102.14 | 25.68,38.78 26.52,38.78 D7.1 | 25.68,38.78 11.49,24.58 3.73,24.58 GND.TP | D9.1 20.97,89.74 18.27,89.74 J4.G2 18.14,89.88 18.14,90.16 17.03,91.26 10.52,91.26 9.41,92.37 9.27,92.44 | D11.1 20.91,94.31 20.91,89.88 D9.1 | D9.1 21.11,89.6 21.11,85.93 D10.1 20.97,85.79 19.94,85.79 18.27,84.13 J4.G1 18.14,83.99 v18.14,71.88 | D6.1 11.9,98.4 9.34,98.4 C9.2 9.27,98.26 9.27,92.44 | J4.P6 7.61,91.4 7.4,91.4 4.98,93.83 4.98,94.17 J4.G4 | 9.27,92.44 8.3,91.47 7.75,91.47 J4.P6 | J4.G3 4.01,81.15 4.01,88.08 7.26,91.33 J4.P6 | U3.4 41.54,51.18 43.62,51.18 45.42,52.98 U3.9 45.35,53.12 45.35,55.47 | v22.29,66.41 22.29,67.31 BME688.5 | v23.74,66.41 23.74,67.24 23.81,67.31 BME688.7 23.95,67.45 23.95,67.86 24.61,68.52 | C7.2 24.16,69.04 C6.2 24.23,68.9 24.61,68.52 | 24.61,68.52 25.2,67.93 25.2,66.69 24.71,66.2 24.71,64.47 BME688.1 | U1.29_1 15.99,48.96 17.17,48.96 U1.29_4 17.3,48.96 18.41,48.96 U1.29_7 | U1.29_2 15.99,50.21 15.99,49.1 U1.29_1 | U1.29_3 15.99,51.45 15.99,50.34 U1.29_2 | U1.29_5 17.17,50.21 16.13,50.21 U1.29_2 | U1.29_7 18.48,49.1 18.48,50.21 U1.29_8 18.48,50.34 18.48,51.45 U1.29_9 | U1.29_6 17.17,51.45 16.13,51.45 U1.29_3 | U1.1 11.49,43 11.49,45.64 14.81,48.96 15.78,48.96 U1.29_1 | U1.29_3 15.92,51.59 11.49,56.02 11.49,60.45 U1.28 11.56,60.59 11.56,60.94 12.11,61.49 14.53,61.49 16.06,63.02 v16.06,63.16 | v25.48,39.06 25.61,38.92 25.68,38.78 | v19.45,45.08 19.45,47.85 18.48,48.82 U1.29_7
  Bottom 0.3: v156.7,54.78 v151.16,54.78 | v50.34,107.2 v51.38,107.2 51.31,107.06 v51.31,102.49 | 17.82,63.47 17.51,63.16 v16.06,63.16 | 17.82,63.47 20.7,66.34 22.15,66.34 v22.29,66.41 v23.74,66.41 23.88,66.34 27.62,62.6 v40.92,62.6 | v18.14,71.88 18.14,65.3 17.3,64.47 17.3,63.99 17.82,63.47 | v19.45,45.08 v25.48,39.06
  other vias: 39,46 45,44 39,57 37,63 31,65 16,36 11,37 7,32 5,29 21,45 95,20 94,18 65,47 78,42 70,55 23,55 16,74 32,61 36,55 91,11 90,18 16,65 19,63 29,68 5,73 139,51
  pour Top: -0.92,-3.92 170.92,-3.92 170.92,110.92 -0.92,110.92
  pour Bottom: -0.92,-2.92 170.92,-2.92 170.92,111.92 -0.92,111.92
GPIO8
  Top 0.15: R1.1 22.84,40.37 22.84,42.94 U1.10
I2C_PW
  Top 0.15: 24.23,63.85 24.23,63.16 R6.2 24.3,63.02 25.41,61.91 25.41,60.52 U1.17 | C7.1 22.84,70.57 22.84,69.04 C6.1 22.84,68.97 22.84,67.59 23.05,67.38 BME688.6 23.05,67.31 23.05,66.55 23.02,66.52 23.61,65.93 23.88,65.93 24.64,66.69 24.64,67.31 BME688.8 | 22,65.79 20.77,65.79 R5.2
  Top 0.152: 22,65.79 22.14,65.93 23,65.93 | 23,65.93 23.88,65.93 | 23,65.93 24.04,64.89 | 24.04,64.89 24.04,64.04 24.23,63.85 | BME688.2 23.87,64.72 24.04,64.89
INT_RTC  (via drill 0.3)
  Top 0.15: R15.1 87.59,61.42 87.59,60 87.59,57.27 U4.3 | v16.89,38.85 20.35,42.31 20.35,42.94 U1.8 20.42,43 20.42,43.28 21.11,43.97 21.46,43.97 36.42,58.93 v40.23,58.93 | v5.12,37.12 4.91,37.12 4.08,36.29 INT_RTC.TP
  Top 0.152: 87.59,60 87.59,59.59 86.93,58.93 v44.1,58.93
  Bottom 0.15: v16.89,38.85 6.85,38.85 v5.12,37.12 | v40.23,58.93 v44.1,58.93
IO/BOOT  (via drill 0.3)
  Top 0.15: R_BOOT.1 22.98,108.58 24.16,108.58 24.23,108.65 BOOT_BUTTON.4 24.3,108.65 27.69,108.65 BOOT_BUTTON.3 29.08,108.65 C4.1 29.15,108.65 v29.84,107.96 | v28.04,69.73 28.04,60.52 U1.15
  Bottom 0.15: v28.04,69.73 28.04,106.16 v29.84,107.96
IO/CHANGE  (via drill 0.3)
  Top 0.15: C3.1 69.03,108.79 67.86,108.79 67.79,108.72 CHANGE_BUTTON.3 67.72,108.65 CHANGE_BUTTON.4 64.12,108.79 63.01,108.79 R_CHANGE.1 63.01,108.72 v62.11,107.82 | v17.86,64.26 17.86,60.52 U1.23
  Bottom 0.15: v17.86,64.26 18.07,64.26 23.05,69.25 28.18,69.25 62.11,103.18 v62.11,107.82
MISO  (via drill 0.3)
  Top 0.15: 5.98,96.22 3.66,98.53 MISO.TP | 5.98,96.22 6.16,96.04 6.16,93.83 7.47,92.51 7.75,92.51 J4.P7 | 22.43,93.41 22.43,94.31 D11.2 22.29,94.31 17.58,99.02 8.79,99.02 5.98,96.22 | 22.43,93.41 22.43,92.09 R12.1 | 37.52,67.38 24.92,79.97 24.92,92.03 23.54,93.41 22.43,93.41 | U3.2 41.54,53.67 41.54,53.95 42.23,54.64 42.23,60.66 37.45,65.45 36.52,66.38 v36.07,65.93 | v33.3,63.16 28.38,58.24 14.74,58.24 12.8,60.18 12.8,60.45 U1.27
  Top 0.152: 37.52,67.38 37.52,65.52 37.45,65.45
  Bottom 0.15: v36.07,65.93 v33.3,63.16
MOSI  (via drill 0.3)
  Top 0.15: R11.1 22.98,83.72 22.98,85.38 22.57,85.79 D10.2 22.5,85.86 v21.74,86.62 | v20.56,87.8 20.28,88.08 J4.P3 | MOSI.TP 3.8,27.29 4.7,27.29 19.04,41.62 19.04,42.94 U1.7 19.11,43 19.11,43.21 19.73,43.84 v19.73,44.04 | v84.41,5.19 84.41,5.89 J3.14 | v50.54,39.06 50.54,41 50.54,49.93 49.37,51.11 U3.5 | v26.72,41.83 27.21,41.83
  Top 0.152: 27.21,41.83 27.24,41.83 27.33,41.74 49.81,41.74 50.54,41
  Bottom 0.15: v20.56,87.8 v21.74,86.62 21.74,76.11 13.98,68.35 13.98,57.55 18.97,52.56 18.97,45.57 | 18.97,45.57 18.97,44.8 v19.73,44.04 | v50.54,39.06 v84.41,5.19 | 18.97,45.57 22.98,45.57 v26.72,41.83
N$1
  Top 0.15: R2-USB1.2 158.85,51.73 162.66,51.73 J1.A5
N$2
  Top 0.15: R2-USB2.1 158.78,54.78 162.66,54.78 J1.B5
N$3
  Top 0.15: Q1.2 139.25,68.07 D2.1 139.18,68.07 137.18,68.07 C1_BAT1.1 137.11,68 137.05,67.95 136.55,67.45 136.55,65.72 IC1.3 | 138.01,66.2 138.01,66.13 138.42,65.72 IC1.1
  Top 0.152: 138.01,66.2 138.01,66.99 137.05,67.95
N$4
  Top 0.15: R1_BAT.2 143.48,51.04 143.48,52.77 143.89,53.18 MCP73831.1
N$5
  Top 0.15: R2_BAT.2 138.98,53.32 141.19,53.32 141.26,53.25 MCP73831.5
N$6
  Top 0.15: GHC_LED.C 137.11,53.39 137.8,53.39 140.15,51.04 142.16,51.04 R1_BAT.1
N$7
  Top 0.15: IC2.5 51.72,103.25 53.59,103.25 53.8,103.46 C_DELAY.1
N$8
  Top 0.15: J3.18 82.47,5.96 82.47,6.51 84.27,8.31 EPD_C3.2
N$9
  Top 0.15: D4.2 96.25,21.33 96.25,18.7 C1.1 96.18,18.63 92.3,18.63 91.06,17.38 82.4,17.38 81.71,18.07 79.21,18.07 D3.1
N$10
  Top 0.15: J3.20 81.43,7.55 82.05,8.17 82.05,8.31 EPD_C6.2
N$11
  Top 0.15: J3.4 89.46,5.96 89.46,8.38 EPD_C1.2
N$12
  Top 0.15: R13.1 92.79,56.78 92.79,59.28 D12.1
N$13
  Top 0.15: J3.5 88.91,7.83 88.36,8.38 EPD_C2.2
N$14
  Top 0.15: J3.22 80.39,5.96 80.39,7.89 80.05,8.24 EPD_C8.2
N$15
  Top 0.15: J3.24 79.35,5.96 79.35,6.79 77.97,8.17 EPD_C10.2
N$18
  Top 0.15: J3.19 81.98,5.96 81.98,7.06 83.23,8.31 EPD_C4.2
PREVGH
  Top 0.15: J3.21 80.94,5.96 80.94,8.24 81.01,8.31 EPD_C7.2 81.08,8.38 81.64,8.93 85.65,8.93 86,9.28 86,10.04 82.95,13.09 82.95,14.61 D5.1
PREVGL
  Top 0.15: J3.23 79.91,5.96 79.91,7.27 78.94,8.24 EPD_C9.2 78.94,8.31 78.45,8.79 77.55,8.79 77.21,9.14 77.21,9.97 79.14,11.91 79.14,14.54 D3.2
RESE
  Top 0.15: J3.3 89.95,5.96 89.95,7.76 90.12,7.93 90.12,11.88 89.95,12.05 R3.2 89.95,12.12 90.29,12.46 90.29,16.41 Q2.2
RESE'
  Top 0.15: R3.1 88.63,12.12 88.63,14.13 R2.2 88.56,14.2 88.56,15.37 87.73,16.2 SJ1.2
RESET  (via drill 0.3)
  Top 0.15: C5.1 54.01,108.79 52.83,108.79 52.76,108.72 RESET_BUTTON.3 | R_RESET.1 47.98,108.79 49.16,108.79 49.23,108.72 RESET_BUTTON.4 49.3,108.65 49.51,108.65 49.58,108.58 50.82,107.34 50.82,107.06 48.88,105.12 48.88,103.25 IC2.1 48.81,103.18 48.54,102.91 v27.55,102.91 | v13.98,47.37 13.98,43 U1.3
  Top 0.152: RESET_BUTTON.3 49.66,108.66 49.58,108.58
  Bottom 0.15: v13.98,47.37 13.98,57.13 13.7,57.41 13.7,81.71 27.55,95.56 v27.55,102.91
RTC_RST  (via drill 0.3)
  Top 0.15: v27.55,63.43 26.72,62.6 26.72,60.52 U1.16 | v79.77,58.45 85.38,58.45 86.28,57.55 86.28,57.27 U4.4
  Bottom 0.15: v27.55,63.43 32.95,63.43 35.93,66.41 71.8,66.41 v79.77,58.45
RX
  Top 0.15: U1.24 16.54,60.52 16.54,63.29 7.89,71.95 3.25,71.95 RX.TP
SCK  (via drill 0.3)
  Top 0.15: v84.48,6.79 84.89,6.37 84.89,5.96 J3.13 | v52.21,39.06 52.21,49.51 49.37,52.35 U3.6 49.3,52.35 48.6,52.35 v48.47,52.22 | v17.23,90.29 7.82,90.29 J4.P5 | v21.8,90.43 22.5,89.74 D9.2 22.57,89.67 22.91,89.32 22.91,87.73 R10.1 22.98,87.66 22.98,86.62 23.74,85.86 23.74,75.07 33.79,65.03 33.79,60.45 | SCK.TP 3.87,30.26 7.26,30.26 17.79,40.79 17.79,42.94 U1.6 17.86,43 17.86,43.28 18.55,43.97 18.97,43.97 33.79,58.79 33.79,60.45 | v33.86,60.45 33.79,60.45
  Bottom 0.15: v52.21,39.06 v84.48,6.79 | v17.23,90.29 21.67,90.29 v21.8,90.43 | v48.47,52.22 46.32,52.22 38.08,60.45 v33.86,60.45
SCL  (via drill 0.3)
  Top 0.15: BME688.4 22.22,64.47 20.77,64.47 R5.1 20.77,64.54 20,65.3 20,66.13 20.77,66.89 v21.6,66.89 | 21.6,60.52 U1.20 | v148.05,10.18 147.15,10.18 U2.7 | v162.31,18.84 162.52,18.84 163.21,19.53 163.49,19.53 J2.4 | v91.33,47.85 90.16,47.85 U4.16
  Top 0.152: BME688.4 22.27,61.33 21.6,60.66 21.6,60.52
  Bottom 0.15: v162.31,18.84 153.66,10.18 v148.05,10.18 147.98,10.18 110.31,47.85 v91.33,47.85 90.99,47.85 71.94,66.89 v21.6,66.89
SDA  (via drill 0.3)
  Top 0.15: BME688.3 23.05,64.4 23.05,63.16 R6.1 22.98,63.02 22.98,63 22.98,60.59 22.91,60.52 U1.19 | v161.69,17.45 155.53,17.45 148.74,10.66 147.15,10.66 U2.8 | v162.45,18.21 163.21,18.21 163.49,18.49 J2.3 | 89.43,48.79 89.81,49.17 v94.86,49.17 | 89.43,48.79 88.91,48.27 88.91,47.92 U4.15 | 89.43,48.79 v88.91,49.31
  Top 0.152: v24.58,62.12 24.26,62.44 23.86,62.44 23.29,63 22.98,63
  Bottom 0.15: v161.69,17.45 v162.45,18.21 162.45,18.28 162.8,18.63 162.8,18.97 132.61,49.17 v94.86,49.17 | v24.58,62.12 31.57,62.12 33.72,59.97 38.15,59.97 62.94,35.18 74.78,35.18 v88.91,49.31
SRC
  Top 0.15: Q2.3 90.99,14.4 90.99,16.9 91.33,17.24 93.2,17.24 95.9,14.54 L1.1 95.97,14.54 97.5,16.07 97.5,18.63 C1.2 97.5,18.7 97.5,21.47 96.94,22.02 95.28,22.02 91.71,18.45 83.24,18.45 D5.2
SS_SD  (via drill 0.3)
  Top 0.15: R7.1 15.5,98.4 13.49,98.4 D6.2 13.49,98.33 v13.49,91.82 | v9.27,87.59 8.72,87.04 8.23,87.04 J4.P2 | v15.23,45.5 15.23,43 U1.4
  Bottom 0.15: v13.49,91.82 v9.27,87.59 9.27,87.52 13.01,83.78 13.01,47.71 v15.23,45.5
TX
  Top 0.15: U1.25 15.3,60.45 15.3,60.18 16.27,59.21 28.94,59.21 29.45,59.72 29.45,68.94 27,71.4 8.86,71.4 5.46,74.79 3.25,74.79 TX.TP
USB_D+  (via drill 0.3)
  Top 0.15: v144.93,56.23 146.32,56.23 148.26,54.29 150.13,54.29 D1.1 | v79.49,55.95 v84.34,55.95 | v47.98,50.76 40.23,43 28.04,43 U1.14
  Bottom 0.15: v144.93,56.23 84.61,56.23 v84.34,55.95 | v79.49,55.95 53.18,55.95 v47.98,50.76
USB_D-  (via drill 0.3)
  Top 0.15: v143.96,52.35 150.13,52.35 D1.3 | v85.17,52.35 v87.11,52.35 | v48.6,50.62 48.47,50.62 39.86,42.01 27.44,42.01 26.72,42.73 26.72,42.94 U1.13
  Bottom 0.15: v87.11,52.35 v143.96,52.35 | v85.17,52.35 50.34,52.35 v48.6,50.62
VBAT  (via drill 0.3)
  Top 0.3: U2.3 145.14,9.7 145.14,10.11 U2.2 145,10.11 144.66,10.11 143.89,10.87 v143.89,44.04 | 144.45,55.61 144.93,55.61 | 144.93,55.61 145.69,55.61 C2_BAT.1 | 144.45,55.61 143.96,55.12 MCP73831.3 | Q1.3 143.13,68.97 143.13,58.38 144.38,57.13 144.38,55.75 144.45,55.61 | v144.93,55.47 144.93,55.61 | v159.34,65.16 VBAT.TP
  Bottom 0.3: v143.89,44.04 143.89,51.52 144.93,52.56 v144.93,55.47 145.07,55.54 154.7,65.16 v159.34,65.16
VBUS
  Top 0.3: R1_PWRUSB.2 137.18,70.15 139.18,70.15 D2.2 139.25,70.01 140.99,70.01 Q1.1 141.05,69.87 141.05,69.25 141.88,68.42 141.88,57.13 C1_BAT.1 141.95,56.99 141.95,56.3 141.12,55.47 141.05,55.33 | 141.05,55.33 138.42,55.33 138.08,54.98 137.11,54.98 GHC_LED.A 136.97,54.85 136.97,54.57 136.34,53.95 136.34,52.91 138.98,50.28 149.92,50.28 151.58,51.94 151.72,52.01 | 141.05,55.33 141.26,55.12 MCP73831.4 | VBUS.TP 167.99,62.19 156.98,62.19 152.27,57.48 C5_USB.1 152.13,57.41 152.13,55.88 C4_USB.1 152.06,55.75 151.72,55.4 151.72,53.88 152.2,53.39 152.62,53.39 D1.5 152.13,53.25 151.72,52.84 151.72,52.01 | 151.72,52.01 153.87,49.86 153.87,48.27 PFMF.050.1.2
VRTC
  Top 0.15: C10.1 92.72,49.79 95.14,49.79 95.9,50.55 C8.1 | R13.2 92.72,55.4 92.72,49.86 C10.1 | U4.14 87.59,48.61 88.77,49.79 92.65,49.79 C10.1
VUSB
  Top 0.3: J1.A9 162.66,55.47 162.66,55.26 J1.B4 162.8,55.19 163.35,55.19 163.91,54.64 163.91,51.31 163.35,50.76 162.8,50.76 J1.B9 162.66,50.69 162.66,50.48 J1.A4 162.52,50.41 160.58,50.41 158.44,48.27 PFMF.050.1.1
(copper drawn outside any net)
  shapes: Top area x1